# Altium PCB sound act spectra.PcbDoc
Units mm, origin at the board's own origin, x right, y up, seen from the top; angles counter-clockwise.
Board outline 152.4 x 101.6 mm, 2 copper layers (Top Layer, Bottom Layer); 17 components, 12 nets, 54 pads, 0 vias.
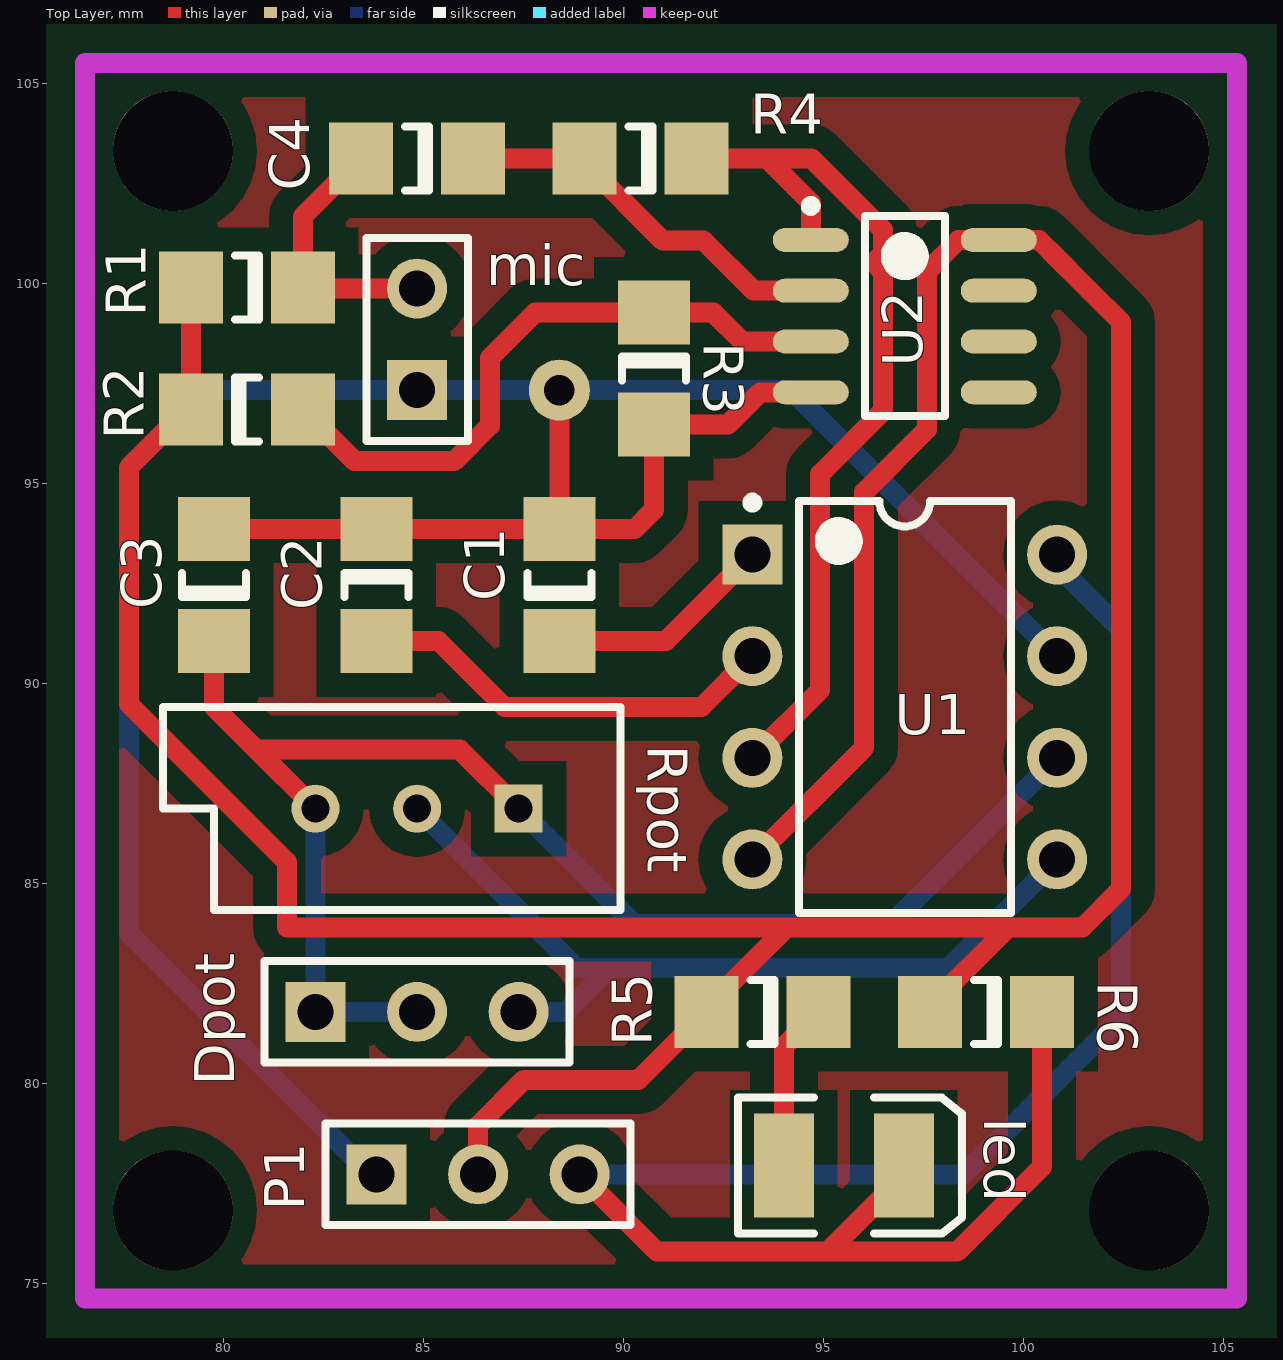
[diagram p0: Top Layer view]
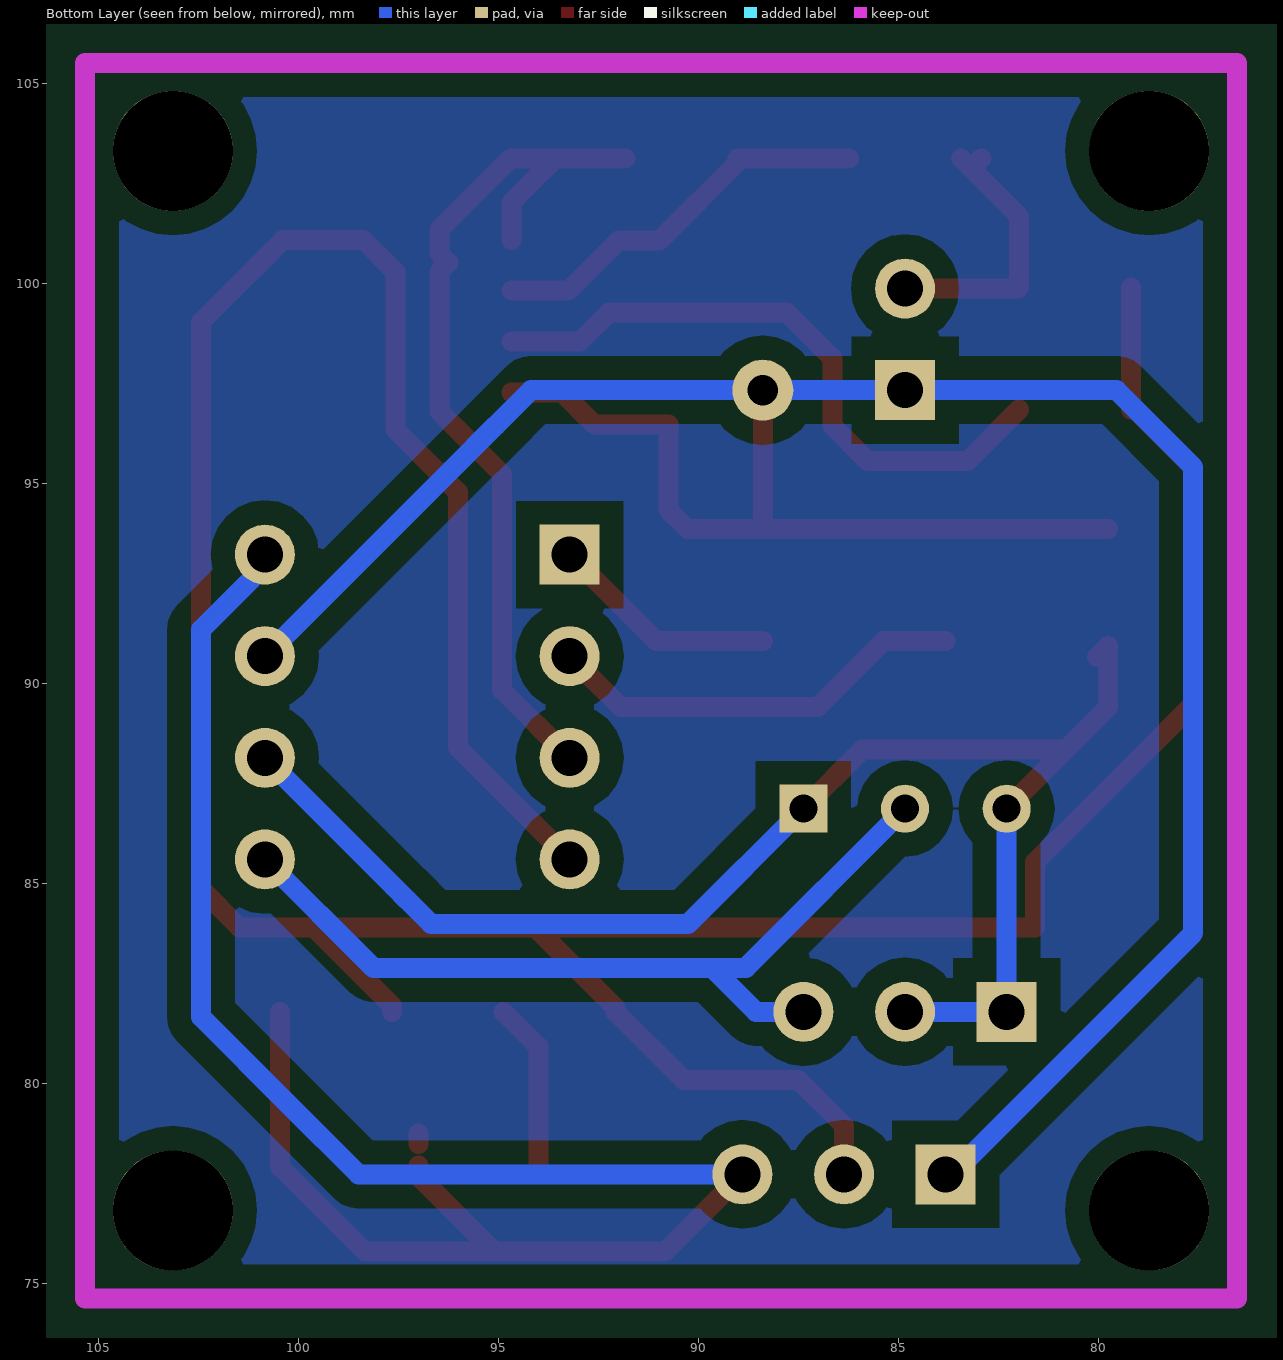
[diagram p1: Bottom Layer view, seen from below]

## Layer stack, top to bottom
Top Layer: signal copper 0.0356
Dielectric: dielectric 0.32, FR-4, Dk 4.8
Bottom Layer: signal copper 0.0356

## Board outline
25.4,25.4 177.8,25.4 177.8,127 25.4,127

## Design rules (kind name [scope] priority, off if disabled: settings)
Clearance [All] p1: gap=0.6
PolygonConnect [All] p1: connectstyle=Relief reliefconductorwidth=0.254 reliefentries=4 polygonreliefangle="90 Angle"
RoutingVias [All] p1: holewidth=0.711 width=1.27 viastyle="Through Hole" minholewidth=0.711 minwidth=1.27 maxholewidth=0.711 maxwidth=1.27
SilkscreenOverComponentPads [All] p1: minsilkscreentomaskgap=0.254
SolderMaskExpansion [All] p1: expansion=0.102
Width [All] p1: maxlimit=0.5 minlimit=0.5 preferedwidth=0.5
27 further rules are at their usual default settings.

## Components (designator, comment, footprint, x,y, rotation, side; value= is the part's Value field where it differs from the comment)
C1 "Cap Semi" 1206 88.392,92.456 r90 top
C2 "Cap Semi" 1206 83.82,92.456 r270 top
C3 "Cap Semi" 1206 79.756,92.456 r90 top
C4 "Cap Semi" 1206 84.836,103.124 r180 top
Dpot "Header 3" HDR1X3 82.296,81.788 r0 top (schematic designator DigPOT)
led "LED3" DSO-C2/D5.6 95.504,77.94 r0 top (schematic designator "led indicator")
mic "Header 2" HDR1X2 84.836,97.328 r90 top
P1 "Header 3" HDR1X3 83.82,77.724 r0 top
R1 "Res3" 1206 80.58,99.898 r180 top
R2 "Res3" 1206 80.58,96.85 r0 top
R3 "Res3" 1206 90.754,97.866 r270 top
R4 "Res3" 1206 90.424,103.124 r180 top
R5 "Res3" 1206 93.472,81.788 r180 top
R6 "Res3" 1206 99.06,81.788 r180 top
Rpot "RPot" VR5 84.836,86.868 r180 top
U1 "LM567CN" N08E 97.028,89.408 r0 top
U2 "LM358ADR" D008_L 97.028,99.18 r0 top

## Footprints (in the part's own frame and the unit in brackets; to place one, negate y for a bottom-side part, rotate by r counter-clockwise, add the part's x,y. Pads: shape width x height; smd on the part's side, far side on the other; paste and mask are expansions set on the pad)
1206 [mm] "Chip Capacitor; Body 3.2 x 1.6 mm (LxW typ)"
  rect 1.6x1.8 smd: 1(-1.4,0) 2(1.4,0)
  silkscreen extent -0.3,-0.8 0.3,0.8
D008_L [mm] "SOIC, 8-Leads, Body 4.9x3.9mm, Pitch 1.27mm, IPC High Density"
  oval 1.9x0.6 smd: 1(-2.35,1.905) 2(-2.35,0.635) 3(-2.35,-0.635) 4(-2.35,-1.905) 5(2.35,-1.905) 6(2.35,-0.635) 7(2.35,0.635) 8(2.35,1.905)
  silkscreen extent -2.47,-2.5 1,2.88, body extent -2,-2.5 2,2.5, height 1.75
DSO-C2/D5.6 [mm] "SM LED; 2 C-Bend Leads; Body 3.5 x 2.8 x 1.9 mm, inc leads (LxWxH typ)"
  rect 1.5x2.6 smd: 1(-1.5,0) 2(1.5,0)
  silkscreen extent -2.65,-1.7 2.95,1.7
HDR1X2 [mm] "Connector; Header; 2 Position"
  rect 1.5x1.5 hole 0.9: 1(0,0)
  round 1.5 hole 0.9: 2(2.54,0)
  silkscreen extent -1.27,-1.27 3.81,1.27
HDR1X3 [mm] "Connector; Header; 3 Position"
  rect 1.5x1.5 hole 0.9: 1(0,0)
  round 1.5 hole 0.9: 2(2.54,0) 3(5.08,0)
  silkscreen extent -1.27,-1.27 6.35,1.27
N08E [mm] "DIP, 8-Leads, Row Spacing 7.62mm, Pitch 2.54mm, Body 9.91x6.35mm"
  rect 1.5x1.5 hole 0.9: 1(-3.81,3.81)
  round 1.5 hole 0.9: 2(-3.81,1.27) 3(-3.81,-1.27) 4(-3.81,-3.81) 5(3.81,-3.81) 6(3.81,-1.27) 7(3.81,1.27) 8(3.81,3.81)
  silkscreen extent -3.93,-5.15 2.65,5.23, body extent -3.6,-5.15 3.6,5.15, height 5.34
VR5 [mm] "Variable Resistor, Thru-Hole; 3 Leads"
  rect 1.2x1.2 hole 0.7: 1(-2.54,0)
  round 1.2 hole 0.7: 2(0,0) 3(2.54,0)
  silkscreen extent -5.08,-2.54 6.35,2.54

## Part data
C1 C2 C3 C4: "Capacitor (Semiconductor SIM Model)"
Dpot P1: "Header, 3-Pin"
led: "Typical BLUE SiC LED"
mic: "Header, 2-Pin"
R1 R2 R3 R4 R5 R6: "Resistor"
Rpot: "Potentiometer"
U1: "Tone Decoder"
U2: "Dual Operational Amplifier"

## Free pads (board coordinates)
  round 1.524 hole 0.762: 0(88.392,97.328)
  round 3 hole 3: 3(78.73,76.825) 3(78.73,103.312) 3(103.14,76.825) 3(103.14,103.312)

## Nets (pads, with @x,y where several pads share a name; then routed paths per layer and width w, separated by ;. In a path a pad name is that pad's centre, name@x,y a point inside that pad or via, vN(x,y) a via of type N, cw(c..) or ccw(c..) an arc to the next point about the centre after c; other vN are vias at no path point)
GND: C1.2 C2.1 C3.2 mic.1 P1.1 pad.0 R3.2 U1.7 U2.4 | length 69.8
  Top Layer w0.5: C3.2 C2.1 C1.2 ; pad.0 C1.2 ; R3.2@90.738,96.45 R3.2 ; U2.4 93.412,97.275 92.603,96.466 R3.2 ; C1.2 90.275,93.856 90.754,94.336 R3.2
  Bottom Layer w0.5: P1.1 83.658,77.724 77.63,83.752 77.63,95.41 79.548,97.328 mic.1 pad.0 94.188,97.328 96.189,95.327 ; 95.066,96.45 96.189,95.327 ; U1.7 96.189,95.327
NetC1_1: C1.1 U1.1 | length 5.7
  Top Layer w0.5: C1.1 91.056,91.056 U1.1
NetC2_2: C2.2 U1.2 | length 10.6
  Top Layer w0.5: C2.2 85.369,91.056 87.019,89.406 91.946,89.406 U1.2
NetC3_1: C3.1 Dpot.1 Dpot.2 Rpot.1 Rpot.3 U1.6 | length 37.6
  Top Layer w0.5: C3.1@80.035,90.653 79.756,90.932 79.756,89.408 80.823,88.341 ; Rpot.3 80.823,88.341 ; 84.979,88.341 84.506,88.341 ; Rpot.1 85.903,88.341 84.506,88.341 ; 80.823,88.341 84.506,88.341
  Bottom Layer w0.5: Rpot.3 Dpot.1 Dpot.2 ; Rpot.1 90.256,83.988 96.688,83.988 97.625,84.925 ; 97.277,84.577 97.625,84.925 ; U1.6 97.625,84.925
NetC4_1: C4.1 R4.2 U2.2 | length 9.9
  Top Layer w0.5: C4.1 88.922,103.124 R4.2@89.024,103.022 ; R4.2 R4.2@89.024,103.022 ; U2.2 93.25,99.815 91.999,101.067 90.979,101.067 R4.2@89.024,103.022
NetC4_2: C4.2 mic.2 R1.1 | length 6.9
  Top Layer w0.5: R1.1@81.988,99.906 R1.1 ; C4.2@82.928,103.124 C4.2@83.033,103.019 ; C4.2 81.98,101.668 R1.1 ; mic.2 82.01,99.868 R1.1
NetDigPOT_3: Dpot.3 Rpot.2 U1.5 | length 21.5
  Bottom Layer w0.5: Rpot.2 88.816,82.888 89.662,82.888 ; Dpot.3 88.562,81.788 89.662,82.888 ; U1.5 98.128,82.888 89.662,82.888
"Netled indicator_1": led.1 R5.1 | length 4.2
  Top Layer w0.5: led.1 94.004,80.92 R5.1
"Netled indicator_2": led.2 P1.3 R6.1 U1.8 | length 48.1
  Top Layer w0.5: P1.3 90.834,75.79 95.021,75.79 95.106,75.79 ; led.2 97.004,77.688 95.106,75.79 ; led.2@97.004,78.488 led.2@97.004,78.74 ; R6.1 100.46,77.913 98.337,75.79 95.106,75.79
  Bottom Layer w0.5: P1.3 98.501,77.724 100.203,79.426 ; 99.912,79.135 100.203,79.426 ; U1.8 100.838,92.941 102.438,91.341 102.438,81.661 100.203,79.426
NetR2_2: R2.2 R3.1 U2.3 | length 16.1
  Top Layer w0.5: R2.2 83.276,95.555 85.765,95.555 86.653,96.443 86.653,98.134 87.785,99.266 R3.1 ; R3.1@90.751,99.263 R3.1 ; U2.3 92.965,98.545 92.244,99.266 R3.1
NetR4_1: R4.1 U1.3 U2.1 | length 23.3
  Top Layer w0.5: R4.1 93.574,103.124 ; U1.3 94.912,89.832 94.912,95.233 96.478,96.799 96.478,100.291 96.25,100.519 96.478,100.747 96.478,101.337 94.691,103.124 93.574,103.124 ; 94.285,102.413 93.84,102.857 ; U2.1 94.678,102.02 93.84,102.857 ; 93.574,103.124 93.84,102.857
VCC: P1.2 R1.2 R2.1 R5.2 R6.2 U1.4 U2.8 | length 91.6
  Top Layer w0.5: R1.2 R2.1 79.086,96.85 77.63,95.394 77.63,89.483 81.585,85.529 81.585,83.896 94.078,83.896 ; P1.2 86.36,78.943 87.503,80.086 90.37,80.086 R5.2 92.072,81.89 94.078,83.896 ; U1.4 96.012,88.392 96.012,94.777 97.578,96.343 97.578,100.291 98.372,101.085 U2.8 100.384,101.085 101.636,99.833 ; R6.2 97.66,81.937 99.619,83.896 ; 100.667,100.802 101.636,99.833 ; 94.078,83.896 99.619,83.896 ; 99.619,83.896 101.473,83.896 102.438,84.861 102.438,99.031 101.636,99.833
pads on no net: U2.5 U2.6 U2.7

## Polygon pours and split planes (outlines as drawn)
no net on Top Layer "Bottom Layer-No Net" (solid): 76.53,105.512 105.34,105.512 105.34,74.625 76.53,74.625 76.53,105.512
no net on Bottom Layer "Bottom Layer-No Net" (solid): 76.53,105.512 105.34,105.512 105.34,74.625 76.53,74.625 76.53,105.512

## Keep-outs
Keep-Out Layer:
  lines w0.5: 76.53,74.625 76.53,79.324 76.53,99.619 76.53,102.464 76.53,105.512 105.34,105.512 105.34,80.448 105.34,74.625 81.229,74.625 76.53,74.625